# Altium PCB AirBee.PcbDoc
Units mil, origin at the board's own origin, x right, y up, seen from the top; angles counter-clockwise.
Board outline 3120.03 x 1915.03 mil, 2 copper layers (Top Layer, Bottom Layer); 13 components, 18 nets, 73 pads, 0 vias.
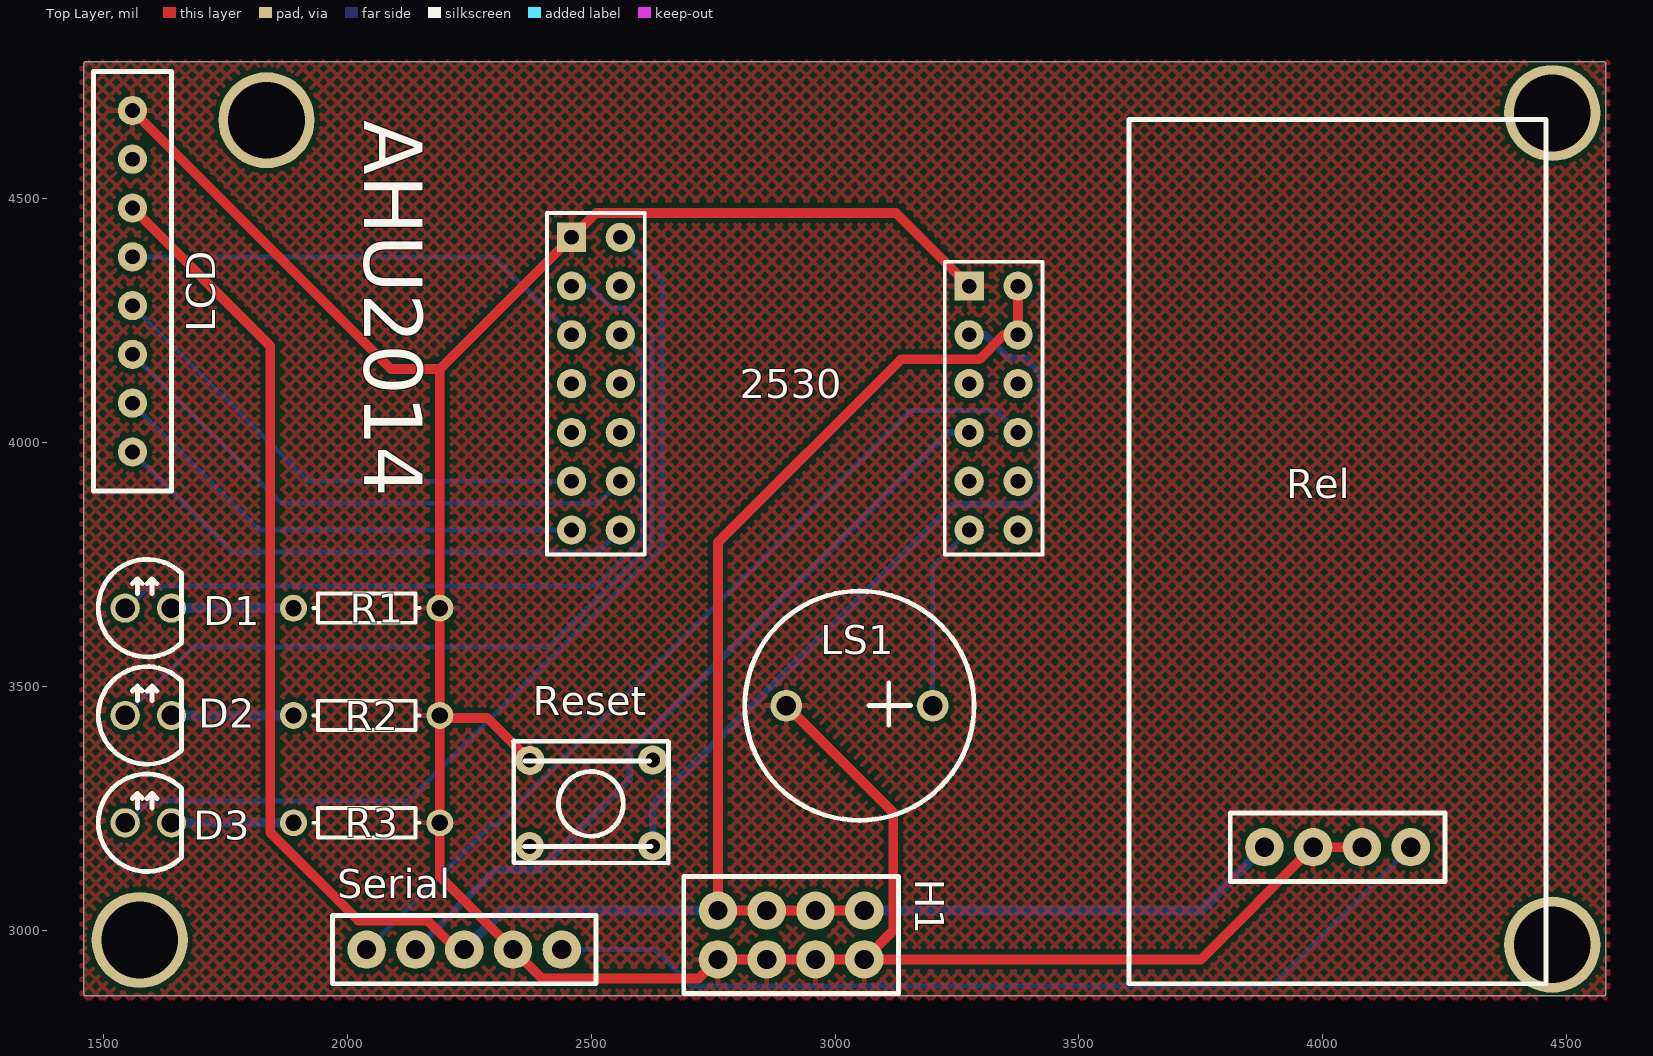
[diagram p0: Top Layer view]
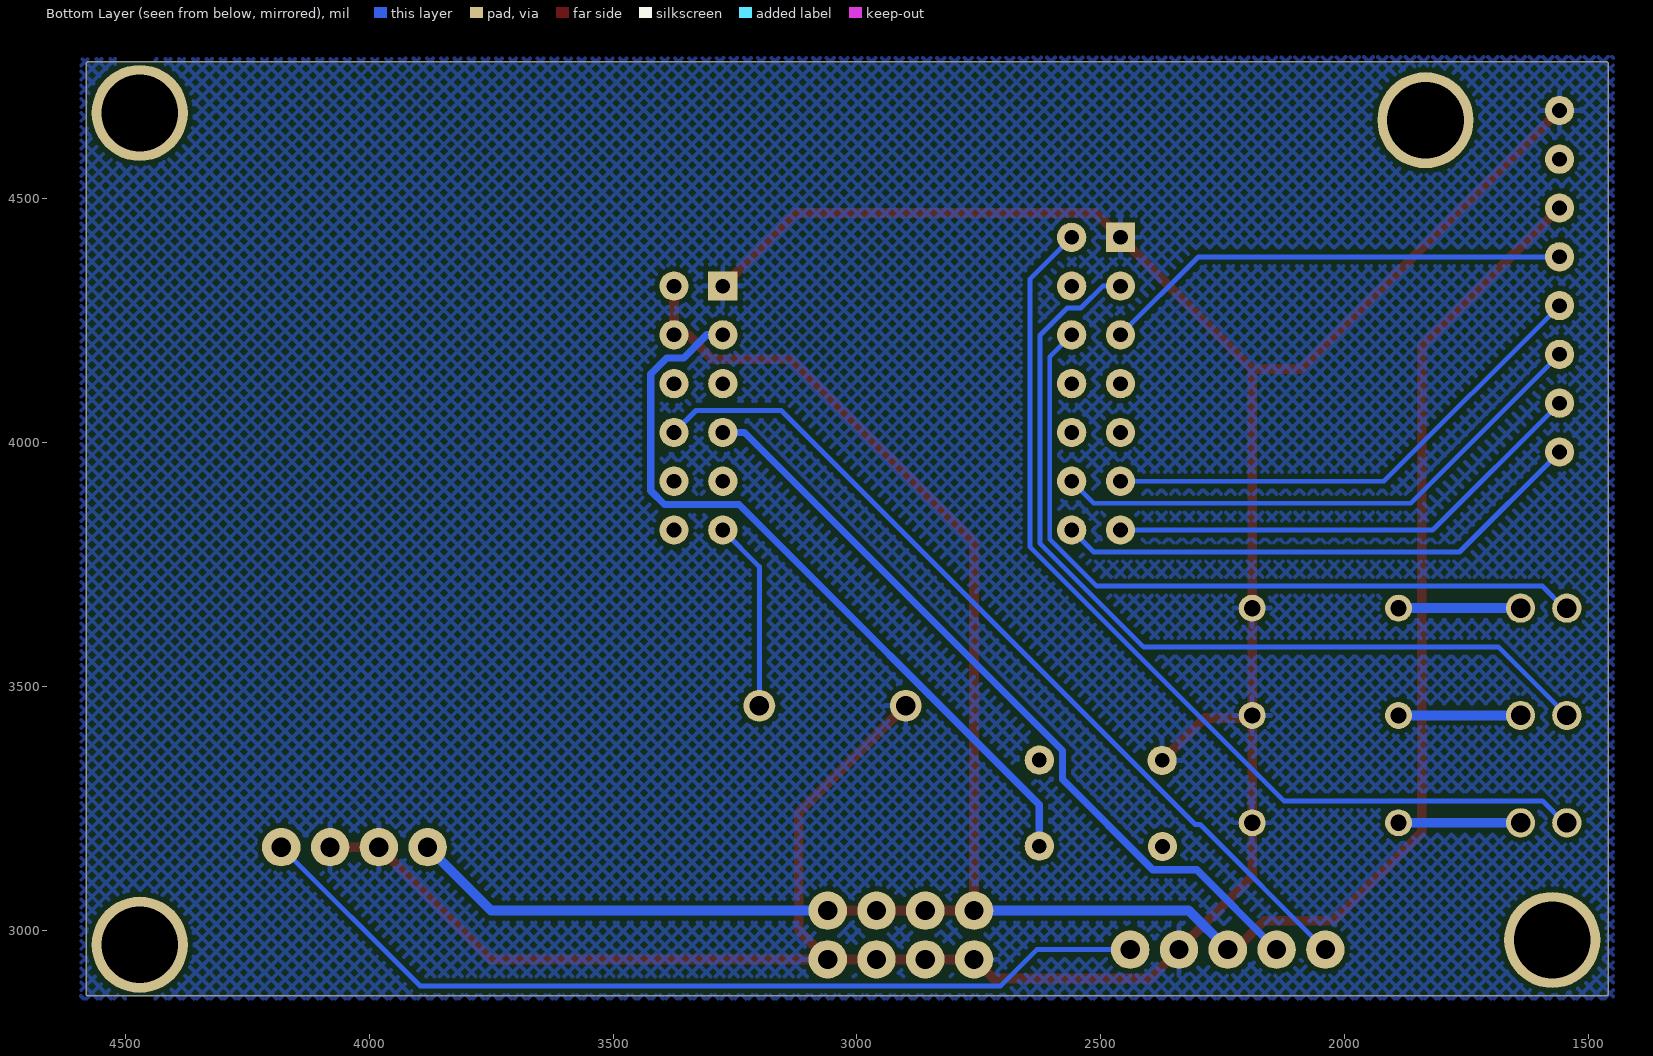
[diagram p1: Bottom Layer view, seen from below]

## Layer stack, top to bottom
Top Layer: signal copper 1.4
Dielectric: dielectric 12.6, FR-4, Dk 4.8
Bottom Layer: signal copper 1.4

## Board outline
1465,2864.99 cw(c1465,2870) 1460.65,2872.5 cw(c1465,2875) 1459.98,2875 1459.98,4775 cw(c1465,4775) 1465,4780.02 4575,4780.02 cw(c4575,4775) 4580.02,4775 4580.02,2870 cw(c4575,2870) 4572.62,2865.59 cw(c4570.24,2870) 4570.24,2864.99

## Design rules (kind name [scope] priority, off if disabled: settings)
Clearance [All] p1: gap=10
PolygonConnect [All] p1: connectstyle=Relief reliefconductorwidth=10 reliefentries=4 polygonreliefangle="90 Angle"
RoutingVias [All] p1: holewidth=28 width=50 viastyle="Through Hole" minholewidth=28 minwidth=50 maxholewidth=28 maxwidth=50
SilkscreenOverComponentPads [All] p1: minsilkscreentomaskgap=10
SolderMaskExpansion [All] p1: expansion=4
TestPointUsage [All] p1: valid=0 allowmultiple=FALSE
Testpoint [All] p1: side=15 testpointundercomponent=TRUE minsize=40 maxsize=100 preferedsize=60 minholesize=0 maxholesize=40 preferedholesize=32 testpointgrid=1 style=1023 order=0123456789
Width VCC_3 [InNet('VCC3')] p1: maxlimit=20 minlimit=20 preferedwidth=20
Width [All] p2: maxlimit=20 minlimit=10 preferedwidth=10 minimp=50.000000 maximp=50.000000 favimp=50.000000
Width GND [InNet('GND')] p3: maxlimit=20 minlimit=20 preferedwidth=20
Width VCC_5 [InNet('VCC5')] p4: maxlimit=20 minlimit=20 preferedwidth=20
23 further rules are at their usual default settings.

## Components (designator, comment, footprint, x,y, rotation, side; value= is the part's Value field where it differs from the comment)
2530 "CC2530_Core" CC2530_Core 2460,4420 r270 top
D1 "LED1" LED 1545,3660 r0 top
D2 "LED2" LED 1545,3440 r0 top
D3 "LED3" LED 1545,3220 r0 top
H1 "Doubleheader" header16 2760,2940 r0 top
LCD "HEAder8" header8 1560,3980 r90 top
LS1 "Buzzer" 5V-BUZZER 3200,3460 r180 top
R1 "Res" AXIAL-0.3 2040,3660 r180 top
R2 "Res" AXIAL-0.3 2040,3440 r180 top
R3 "Res" AXIAL-0.3 2040,3220 r180 top
Rel "Relay" RELAY 3880,3040 r0 top
Reset "Switch" 微动开关 2500,3260 r180 top
Serial "Serial" header5 2040,2960 r0 top

## Footprints (in the part's own frame and the unit in brackets; to place one, negate y for a bottom-side part, rotate by r counter-clockwise, add the part's x,y. Pads: shape width x height; smd on the part's side, far side on the other; paste and mask are expansions set on the pad)
5V-BUZZER [mil]
  round 65 hole 40: 1(0,0) 2(300,0)
  silkscreen extent -85,-235 385,235
AXIAL-0.3 [mm] "Resistor; 2 Leads"
  round 1.4 hole 0.85: 1(-3.81,0) 2(3.81,0)
  silkscreen extent -2.77,-0.76 2.77,0.76
CC2530_Core [mil] "Connector; Header; 7x2 Position"
  rect 60x60 hole 30: 0(0,0) 14(100,815)
  round 60 hole 30: 1(0,100) 2(100,0) 3(100,100) 4(200,0) 5(200,100) 6(300,0) 7(300,100) 8(400,0) 9(400,100) 10(500,0) 11(500,100) 12(600,0) 13(600,100) 15(100,915) 16(200,815) 17(200,915) 18(300,815) 19(300,915) 20(400,815) 21(400,915) 22(500,815) 23(500,915) 24(600,815) 25(600,915)
  silkscreen extent -50,-50 650,965
header5 [mm]
  round 2 hole 1: 1(0,0) 2(2.54,0) 3(5.08,0) 4(7.62,0) 5(10.16,0)
  silkscreen extent -1.78,-1.78 11.94,1.78
header8 [mil]
  round 60 hole 30: 1(0,0) 2(100,0) 3(200,0) 4(300,0) 5(400,0) 6(500,0) 7(600,0) 8(700,0)
  silkscreen extent -80,-80 780,80
header16 [mm]
  round 2 hole 1: 1(0,0) 2(2.54,0) 3(5.08,0) 4(7.62,0) 5(7.62,2.54) 6(5.08,2.54) 7(2.54,2.54) 8(0,2.54)
  silkscreen extent -1.78,-1.78 9.4,4.32
LED [mil]
  round 60 hole 40: 1(0,0) 2(95,0)
  silkscreen extent -55,-100 116,100
RELAY [mm]
  round 2 hole 1: 1(0,3.302) 2(2.54,3.302) 3(5.08,3.302) 4(7.62,3.302)
  silkscreen extent -7.04,-3.81 14.66,41.19
微动开关 [mil]
  round 60 hole 30: 1(-126.18,87.8) 2(125.4,-87.79) 3(126.18,88.58) 4(-126.18,-88.58)
  Top Layer lines w15: -124.44,98.26 -126.18,98.26 ; -124.44,98.26 -126.18,98.26 ; -124.44,98.26 -126.18,98.26 ; -124.44,98.26 -126.18,98.26 ; -125.54,87.16 -127.44,85.26 ; -125.54,87.16 -127.44,85.26 ; -125.54,87.16 -127.44,85.26 ; -125.54,87.16 -127.44,85.26 ; -125.54,87.16 -127.44,85.26 ; -126.18,98.26 -140.44,98.26 ; -126.18,98.26 -140.44,98.26 ; -126.18,98.26 -140.44,98.26 ; -126.18,98.26 -140.44,98.26
  silkscreen extent -158,-127 159,123

## Part data
D1 D2 D3: library part LED0, "Typical INFRARED GaAs LED"
LS1: "Magnetic Transducer Buzzer"
R1 R2 R3: library part Res1, "Resistor"

## Free pads (board coordinates)
  round 196.85 hole 157.48: 0(1575,2980) 0(1835,4660) 0(4470,2970) 0(4470,4675)

## Nets (pads, with @x,y where several pads share a name; then routed paths per layer and width w, separated by ;. In a path a pad name is that pad's centre, name@x,y a point inside that pad or via, vN(x,y) a via of type N, cw(c..) or ccw(c..) an arc to the next point about the centre after c; other vN are vias at no path point)
GND: 2530.0 2530.14 H1.1 H1.2 H1.3 H1.4 LCD.8 LS1.2 R1.1 R2.1 R3.1 Rel.2 Rel.3 Reset.2 Serial.4 | length 6115.8
  Top Layer w20: LCD.8 2090,4150 2190,4150 ; Reset.2 2287.4,3435 2195,3435 R2.1 ; LS1.2 3119.37,3240.63 3119.37,2999.37 H1.4 ; 2530.14 3125,4470 2510,4470 2530.0 2190,4150 ; Rel.3 Rel.2 3750,2940 H1.4 ; R2.1 R3.1 2190,3110 Serial.4 2399.37,2900.63 2720.63,2900.63 H1.1 H1.2 H1.3 H1.4 ; R2.1 R1.1 2190,4150
Net2530_1: 2530.1 D3.1 | length 2004.4
  Bottom Layer w10: D3.1 1550,3220 1595,3265 2125.21,3265 2645,3784.79 2645,4335 2530.1
Net2530_2: 2530.2 D2.1 | length 1858.8
  Bottom Layer w10: D2.1 1685,3580 2411.92,3580 2625,3793.08 2625,4218.64 2568.64,4275 2541.36,4275 2496.36,4320 2530.2
Net2530_5: 2530.5 D1.1 | length 1555.8
  Bottom Layer w10: D1.1 1550,3660 1595,3705 2508.64,3705 2605,3801.36 2605,4175 2530.5
Net2530_16: 2530.16 Reset.1 | length 1567.6
  Bottom Layer w15: Reset.1 2626.18,3256.89 3241.79,3872.5 3394.68,3872.5 3422.5,3900.32 3422.5,4139.68 3389.68,4172.5 3355.32,4172.5 3307.82,4220 2530.16
Net2530_24: 2530.24 LS1.1 | length 391.1
  Bottom Layer w10: LS1.1 3200,3745 2530.24
NetD1_2: D1.2 R1.2 | length 250
  Bottom Layer w20: D1.2 R1.2
NetD2_2: D2.2 R2.2 | length 250
  Bottom Layer w20: D2.2 R2.2
NetD3_2: D3.2 R3.2 | length 250
  Bottom Layer w20: D3.2 R3.2
OP1_0: 2530.13 LCD.1 | length 1103.6
  Bottom Layer w10: LCD.1 1765,3775 2515,3775 2530.13
OP1_1: 2530.12 LCD.2 | length 1007.7
  Bottom Layer w10: LCD.2 1820,3820 2530.12
OP1_2: 2530.11 LCD.3 | length 1145
  Bottom Layer w10: LCD.3 1865,3875 2515,3875 2530.11
OP1_3: 2530.10 LCD.4 | length 1049.1
  Bottom Layer w10: LCD.4 1920,3920 2530.10
OP2_3: 2530.4 LCD.5 | length 966.3
  Bottom Layer w10: LCD.5 2300,4380 2530.4
RELAY: Rel.4 Serial.5 | length 1888.6
  Bottom Layer w10: Serial.5 2631.26,2960 2705.63,2885.63 3895.63,2885.63 Rel.4
UART0_RX: 2530.20 Serial.2 | length 1608.7
  Bottom Layer w15: Serial.2 2303.92,3123.92 2393.49,3123.92 2578.68,3309.1 2578.68,3368.26 3230.42,4020 2530.20
UART0_TX: 2530.21 Serial.1 | length 1811.3
  Bottom Layer w10: Serial.1 2296.42,3216.42 2306.87,3216.42 3155.45,4065 3330,4065 2530.21
VCC3: 2530.15 2530.17 H1.5 H1.6 H1.7 H1.8 LCD.6 Rel.1 Serial.3 | length 5266.8
  Top Layer w20: LCD.6 1842.44,4197.56 1842.44,3200.3 2023.37,3019.37 2164.59,3019.37 2223.96,2960 Serial.3 ; H1.5 H1.6 H1.7 H1.8 2760,3795 3135,4170 3295.71,4170 3345.71,4220 2530.17 2530.15
  Bottom Layer w20: Serial.3 2320,3040 H1.8 ; H1.5 3750,3040 Rel.1
pads on no net: 2530.3 2530.6 2530.7 2530.8 2530.9 2530.18 2530.19 2530.22 2530.23 2530.25 LCD.7 Reset.3 Reset.4

## Polygon pours and split planes (outlines as drawn)
GND on Top Layer "Top Layer-No Net" (hatched 45Degree grid 20 track 8): 1460,4780 1455,4775 1455,2860 4585,2860 4590,2865 4585,2870 4585,4780
GND on Bottom Layer "Top Layer-No Net" (hatched 45Degree grid 20 track 8): 1450,4790 1450,2855 1455,2860 4595,2860 4590,2865 4590,4785

## Silkscreen, mask and mechanical layers (free items; w line width, h text height)
Top Overlay:
  text "AHU2014" at 2035,4660 h120 r270